# EAGLE board Right (EAGLE 8.2.0)
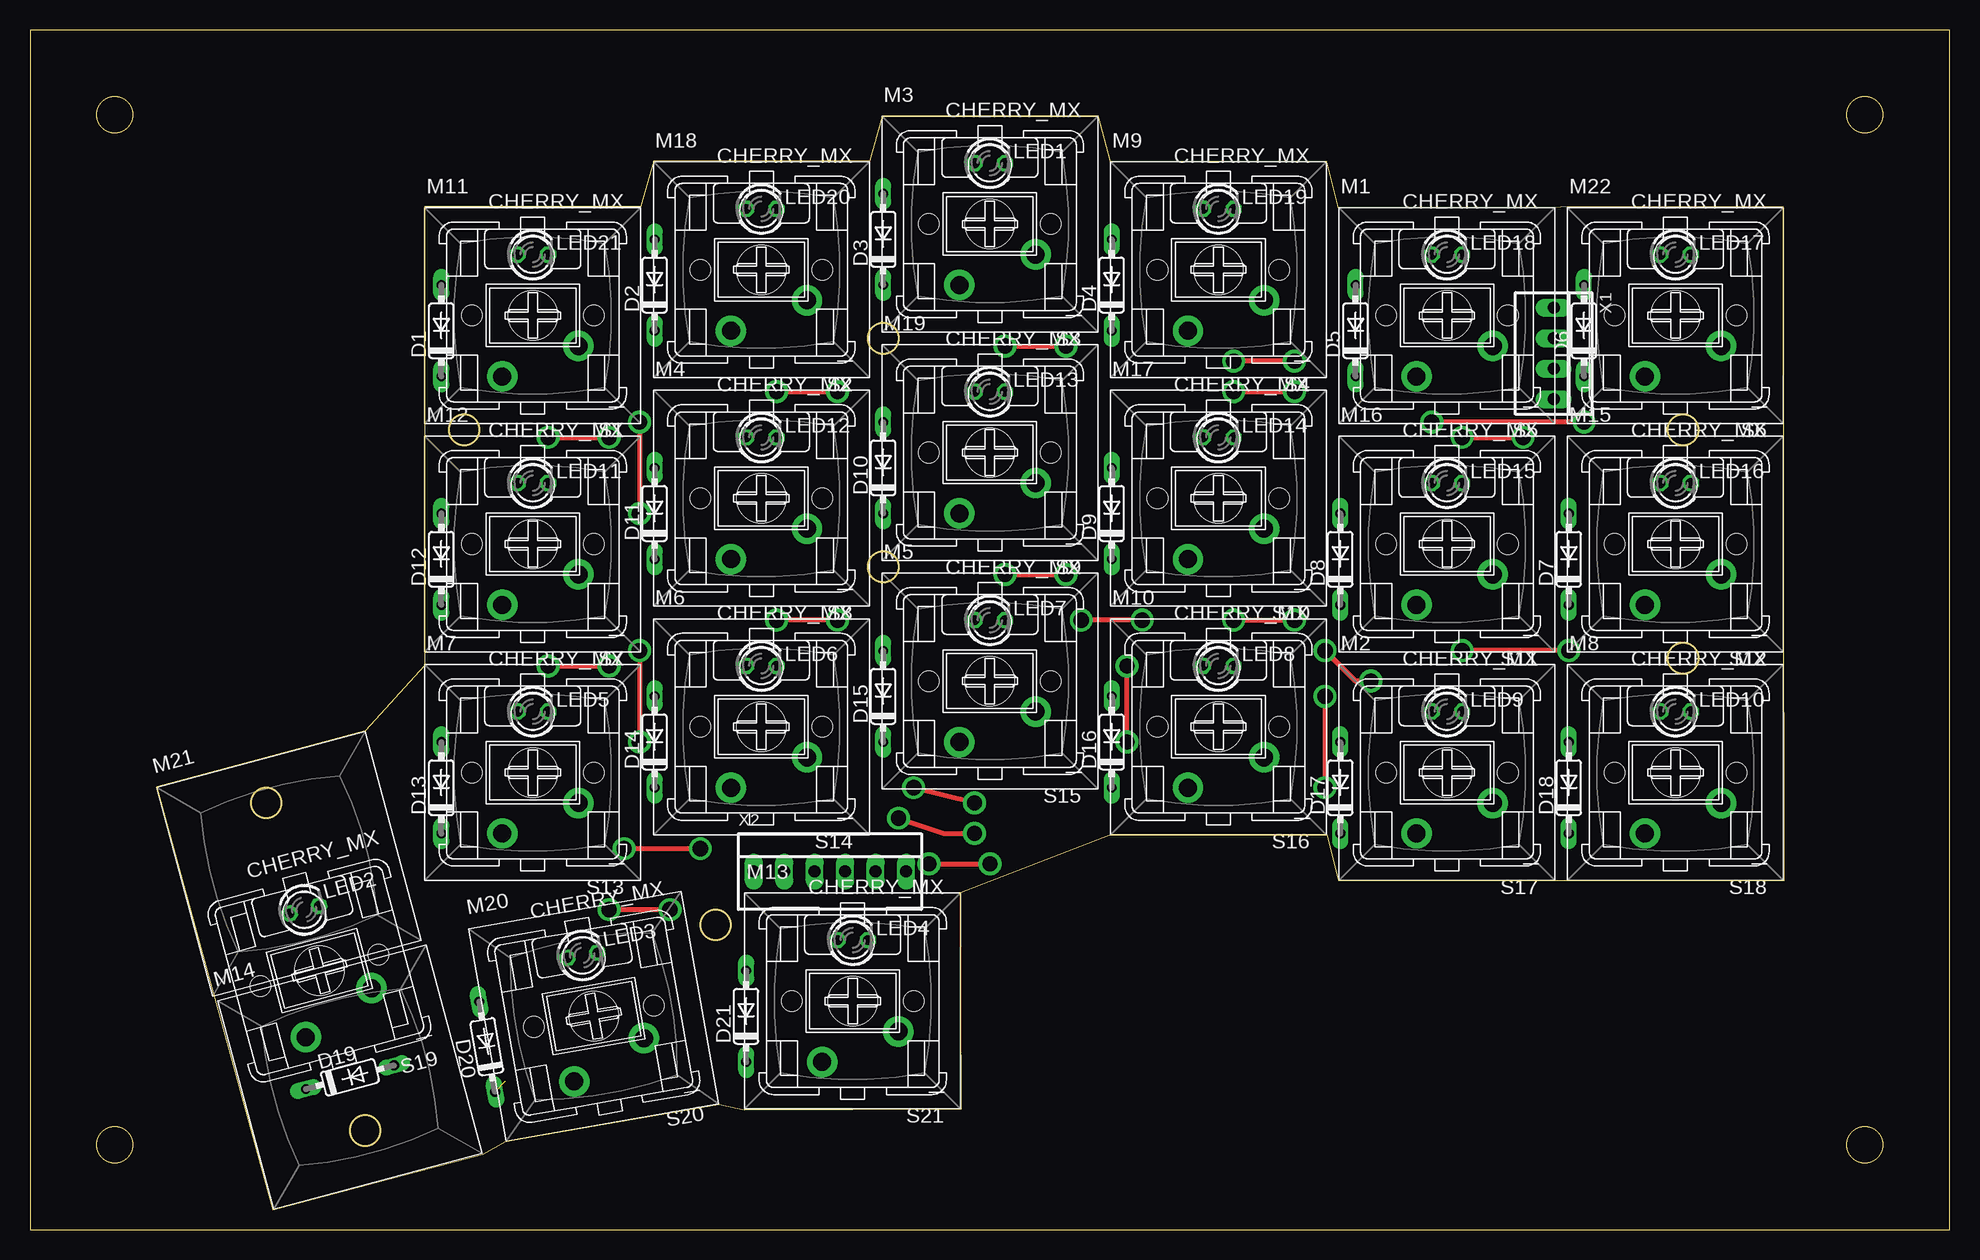
[diagram p0: board, top side]
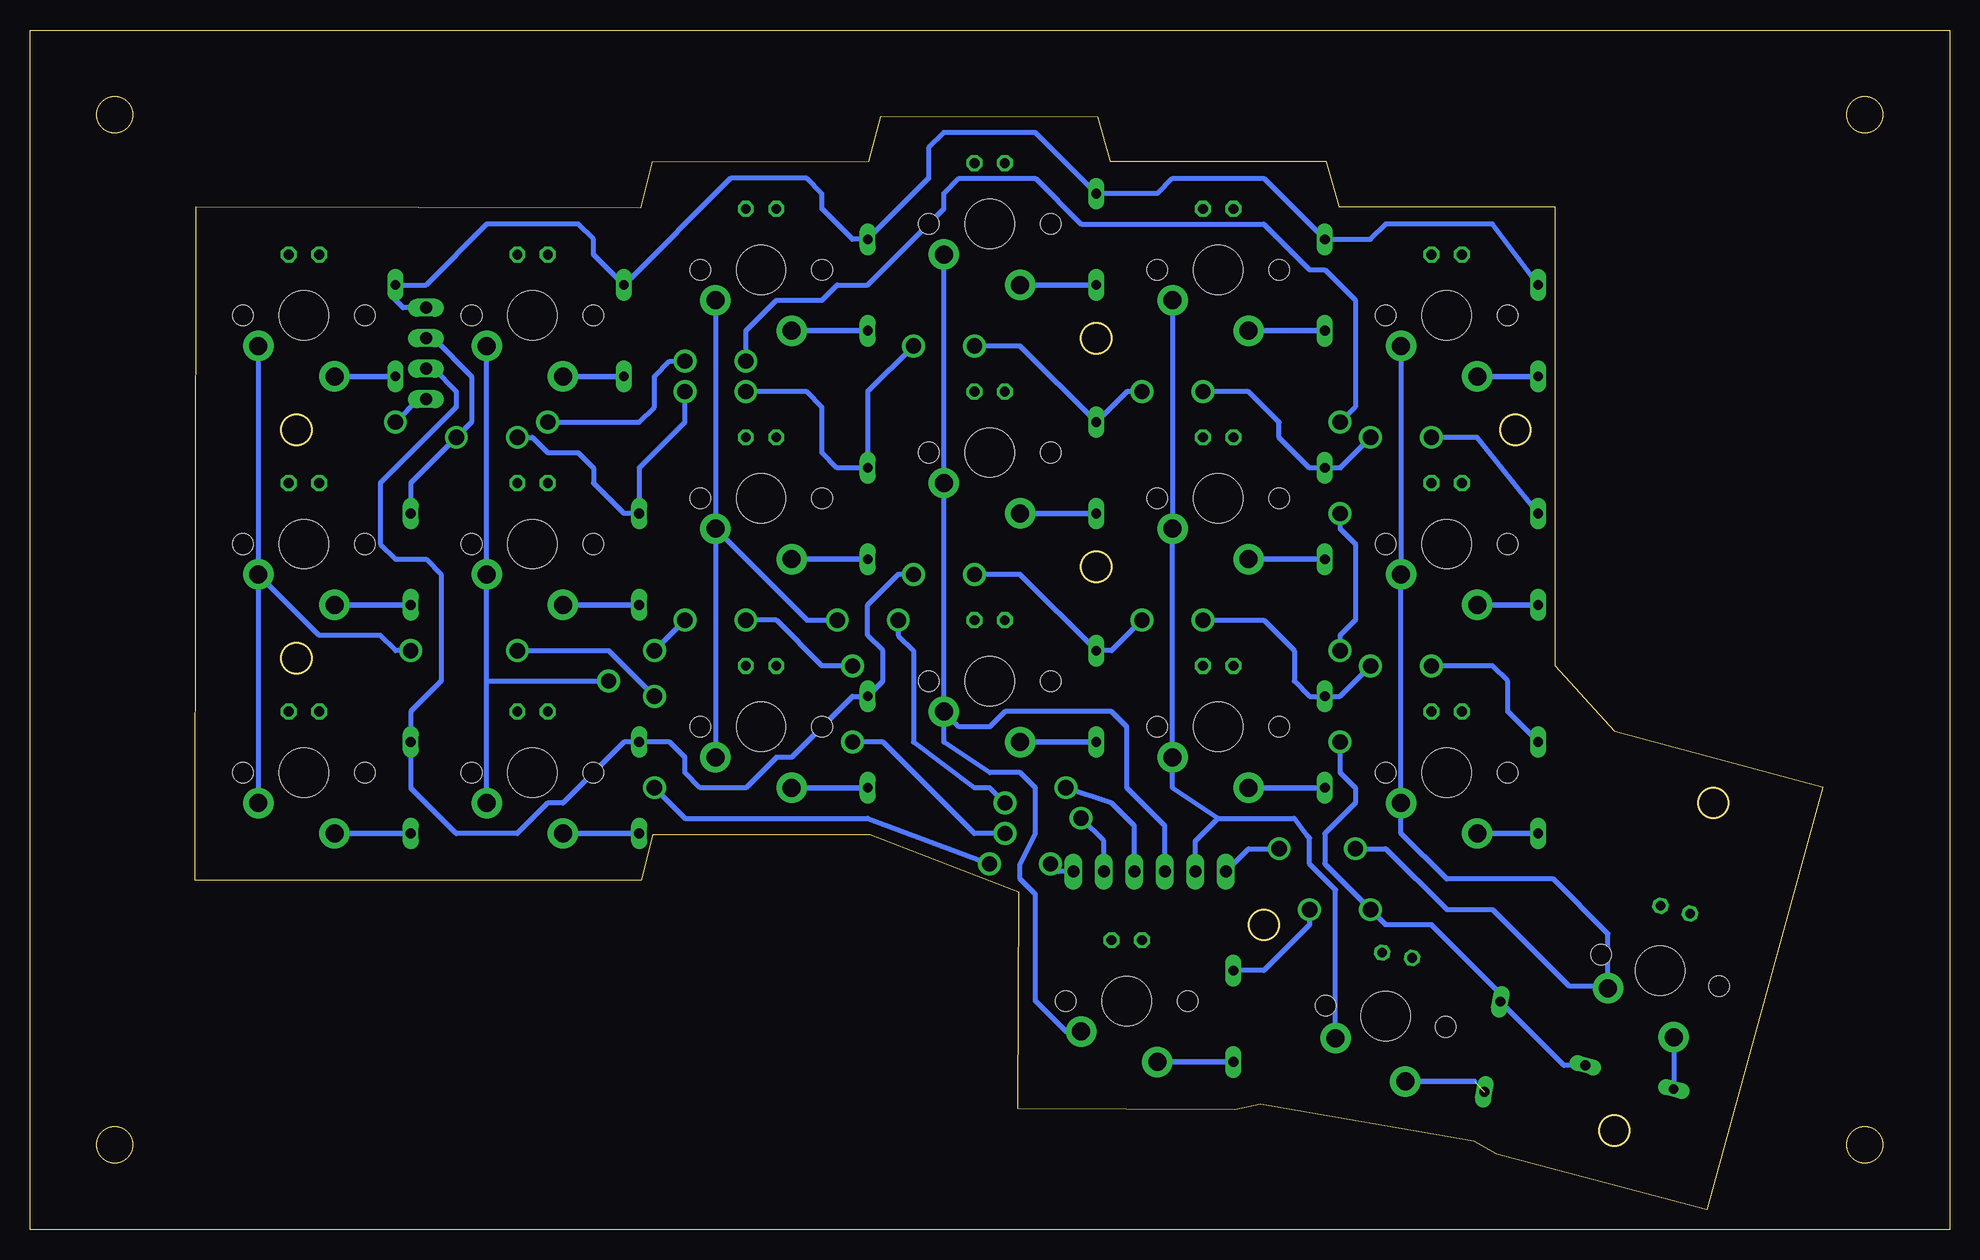
[diagram p1: board, bottom side, seen from below]

Size 160 x 100 mm. Coordinates in mm from the lower left corner, seen from the top.
Outline: 0,0 160,0 160,100 0,100 0,0
Outline: 20.25,1.66 37.71,6.28 39.63,7.34 57.43,10.42 59.58,9.99 77.64,10.05 77.58,28.11 90,32.91 108.12,32.91 109.05,29.1 146.22,29.1 146.16,85.26 109.05,85.2 108.12,89.01 90.06,89.07 89.07,92.82 71.01,92.76 69.96,89.07 51.96,89.07 50.91,85.26 32.91,85.26 32.91,47.01 27.94,41.56 10.55,36.91 20.25,1.66
Outline: circle at 7.07,92.93 radius 1.5
Outline: circle at 7.07,7.07 radius 1.5
Outline: circle at 152.93,7.07 radius 1.5
Outline: circle at 152.93,92.93 radius 1.5
Outline: circle at 71.12,55.24 radius 1.27
Outline: circle at 71.12,74.3 radius 1.27
Outline: circle at 137.79,66.67 radius 1.27
Outline: circle at 137.79,47.62 radius 1.27
Outline: circle at 36.2,66.67 radius 1.27
Outline: circle at 19.68,35.56 radius 1.27
Outline: circle at 27.94,8.26 radius 1.27
Outline: circle at 57.15,25.4 radius 1.27
Copper layers (1*16): Top 0.035mm / dielectric 1.5mm / Bottom 0.035mm
Design rules "default": minimum track width 6mil, minimum drill 0.35mm, track to track 6mil, track to pad 6mil, pad to pad 6mil, via to via 6mil, smd to smd 6mil, copper to edge 40mil, drill to drill 6mil, minimum pad ring 10mil, minimum via ring 8mil, stop-mask expansion 4mil, vias tented up to drill 0mil, thermal gap 10mil

## Footprints (pad centres in the part's own frame; a part is rotated, then mirrored left to right if it is on the bottom)
DO35-7 = drill 0.813 long: A 3.81,0; C -3.81,0
LED3MM = drill 0.813 octagon: A -1.27,0; K 1.27,0
CHERRY_MX = drill 1.5 pad 2.54: S1 -3.81,2.54; S2 2.54,5.08 | hole 1.7: -5.08,0; 5.08,0 | hole 4.1: 0,0
22-23-2041 = drill 1 long: 1 -3.81,0; 2 -1.27,0; 3 1.27,0; 4 3.81,0
22-23-2061 = drill 1 long: 1 -6.35,0; 2 -3.81,0; 3 -1.27,0; 4 1.27,0; 5 3.81,0; 6 6.35,0

## Placement (x,y rotation side)
D1  1N4148DO35-7  [DO35-7]  34.29,74.93 90 top
D2  1N4148DO35-7  [DO35-7]  52.07,78.74 90 top
D3  1N4148DO35-7  [DO35-7]  71.12,82.55 90 top
D4  1N4148DO35-7  [DO35-7]  90.17,78.74 90 top
D5  1N4148DO35-7  [DO35-7]  110.49,74.93 90 top
D6  1N4148DO35-7  [DO35-7]  129.54,74.93 90 top
D7  1N4148DO35-7  [DO35-7]  128.27,55.88 90 top
D8  1N4148DO35-7  [DO35-7]  109.22,55.88 90 top
D9  1N4148DO35-7  [DO35-7]  90.17,59.69 90 top
D10  1N4148DO35-7  [DO35-7]  71.12,63.5 90 top
D11  1N4148DO35-7  [DO35-7]  52.07,59.69 90 top
D12  1N4148DO35-7  [DO35-7]  34.29,55.88 90 top
D13  1N4148DO35-7  [DO35-7]  34.29,36.83 90 top
D14  1N4148DO35-7  [DO35-7]  52.07,40.64 90 top
D15  1N4148DO35-7  [DO35-7]  71.12,44.45 90 top
D16  1N4148DO35-7  [DO35-7]  90.17,40.64 90 top
D17  1N4148DO35-7  [DO35-7]  109.22,36.83 90 top
D18  1N4148DO35-7  [DO35-7]  128.27,36.83 90 top
D19  1N4148DO35-7  [DO35-7]  26.67,12.7 15 top
D20  1N4148DO35-7  [DO35-7]  38.1,15.24 100 top
D21  1N4148DO35-7  [DO35-7]  59.69,17.78 90 top
LED1  [LED3MM]  80.01,88.9 0 top
LED2  [LED3MM]  22.86,26.67 15 top
LED3  [LED3MM]  46.04,22.86 10 top
LED4  [LED3MM]  68.58,24.13 0 top
LED5  [LED3MM]  41.91,43.18 0 top
LED6  [LED3MM]  60.96,46.99 0 top
LED7  [LED3MM]  80.01,50.8 0 top
LED8  [LED3MM]  99.06,46.99 0 top
LED9  [LED3MM]  118.11,43.18 0 top
LED10  [LED3MM]  137.16,43.18 0 top
LED11  [LED3MM]  41.91,62.23 0 top
LED12  [LED3MM]  60.96,66.04 0 top
LED13  [LED3MM]  80.01,69.85 0 top
LED14  [LED3MM]  99.06,66.04 0 top
LED15  [LED3MM]  118.11,62.23 0 top
LED16  [LED3MM]  137.16,62.23 0 top
LED17  [LED3MM]  137.16,81.28 0 top
LED18  [LED3MM]  118.11,81.28 0 top
LED19  [LED3MM]  99.06,85.09 0 top
LED20  [LED3MM]  60.96,85.09 0 top
LED21  [LED3MM]  41.91,81.28 0 top
M1  DSA_KEYCAP  [DSA_KEYCAP]  118.11,76.2 0 top
M2  DSA_KEYCAP  [DSA_KEYCAP]  118.11,38.1 0 top
M3  DSA_KEYCAP  [DSA_KEYCAP]  80.01,83.82 0 top
M4  DSA_KEYCAP  [DSA_KEYCAP]  60.96,60.96 0 top
M5  DSA_KEYCAP  [DSA_KEYCAP]  80.01,45.72 0 top
M6  DSA_KEYCAP  [DSA_KEYCAP]  60.96,41.91 0 top
M7  DSA_KEYCAP  [DSA_KEYCAP]  41.91,38.1 0 top
M8  DSA_KEYCAP  [DSA_KEYCAP]  137.16,38.1 0 top
M9  DSA_KEYCAP  [DSA_KEYCAP]  99.06,80.01 0 top
M10  DSA_KEYCAP  [DSA_KEYCAP]  99.06,41.91 0 top
M11  DSA_KEYCAP  [DSA_KEYCAP]  41.91,76.2 0 top
M12  DSA_KEYCAP  [DSA_KEYCAP]  41.91,57.15 0 top
M13  DSA_KEYCAP  [DSA_KEYCAP]  68.58,19.05 0 top
M14  DSA_KEYCAP  [DSA_KEYCAP]  26.67,12.7 15 top
M15  DSA_KEYCAP  [DSA_KEYCAP]  137.16,57.15 0 top
M16  DSA_KEYCAP  [DSA_KEYCAP]  118.11,57.15 0 top
M17  DSA_KEYCAP  [DSA_KEYCAP]  99.06,60.96 0 top
M18  DSA_KEYCAP  [DSA_KEYCAP]  60.96,80.01 0 top
M19  DSA_KEYCAP  [DSA_KEYCAP]  80.01,64.77 0 top
M20  DSA_KEYCAP  [DSA_KEYCAP]  46.99,17.78 10 top
M21  DSA_KEYCAP  [DSA_KEYCAP]  21.59,30.48 15 top
M22  DSA_KEYCAP  [DSA_KEYCAP]  137.16,76.2 0 top
S1  CHERRY_MX  [CHERRY_MX]  41.91,76.2 180 top
S2  CHERRY_MX  [CHERRY_MX]  60.96,80.01 180 top
S3  CHERRY_MX  [CHERRY_MX]  80.01,83.82 180 top
S4  CHERRY_MX  [CHERRY_MX]  99.06,80.01 180 top
S5  CHERRY_MX  [CHERRY_MX]  118.11,76.2 180 top
S6  CHERRY_MX  [CHERRY_MX]  137.16,76.2 180 top
S7  CHERRY_MX  [CHERRY_MX]  41.91,57.15 180 top
S8  CHERRY_MX  [CHERRY_MX]  60.96,60.96 180 top
S9  CHERRY_MX  [CHERRY_MX]  80.01,64.77 180 top
S10  CHERRY_MX  [CHERRY_MX]  99.06,60.96 180 top
S11  CHERRY_MX  [CHERRY_MX]  118.11,57.15 180 top
S12  CHERRY_MX  [CHERRY_MX]  137.16,57.15 180 top
S13  CHERRY_MX  [CHERRY_MX]  41.91,38.1 180 top
S14  CHERRY_MX  [CHERRY_MX]  60.96,41.91 180 top
S15  CHERRY_MX  [CHERRY_MX]  80.01,45.72 180 top
S16  CHERRY_MX  [CHERRY_MX]  99.06,41.91 180 top
S17  CHERRY_MX  [CHERRY_MX]  118.11,38.1 180 top
S18  CHERRY_MX  [CHERRY_MX]  137.16,38.1 180 top
S19  CHERRY_MX  [CHERRY_MX]  24.13,21.59 195 top
S20  CHERRY_MX  [CHERRY_MX]  46.99,17.78 190 top
S21  CHERRY_MX  [CHERRY_MX]  68.58,19.05 180 top
X1  22-23-2041  [22-23-2041]  127,73.03 270 top
X2  [22-23-2061]  66.67,29.84 0 top

## Library data of the parts
D1-D21 = diode
LED1-LED21 = led
M1-M22 = cherry
S1-S21 = cherry; FARNELL: 2292961; MOUSER: 540-MX1A-11NW
X1 = con-molex; MF: MOLEX; MPN: 22-23-2041; OC_FARNELL: 1462920; OC_NEWARK: 38C0355
X2 = con-molex; MF: MOLEX; MPN: 22-23-2061; OC_FARNELL: 1462922; OC_NEWARK: 27C1933

## Nets
N$1: D1.C S1.S2
N$2: D2.C S2.S2
N$3: D3.C S3.S2
N$4: D4.C S4.S2
N$5: D5.C S5.S2
N$6: D6.C S6.S2
N$7: D7.C S12.S2
N$8: D8.C S11.S2
N$9: D9.C S10.S2
N$10: D10.C S9.S2
N$11: D11.C S8.S2
N$12: D12.C S7.S2
N$13: D13.C S13.S2
N$14: D14.C S14.S2
N$15: D15.C S15.S2
N$16: D16.C S16.S2
N$17: D17.C S17.S2
N$18: D18.C S18.S2
N$19: D19.C S19.S2
N$20: D20.C S20.S2
N$21: D21.C S21.S2
N$22: S3.S1 S9.S1 S15.S1 S21.S1 X2.3
N$23: S2.S1 S8.S1 S14.S1 S20.S1 X2.2
N$24: S1.S1 S7.S1 S13.S1 S19.S1 X2.1
N$25: S4.S1 S10.S1 S16.S1 X2.4
N$26: S5.S1 S11.S1 S17.S1 X2.5
N$27: S6.S1 S12.S1 S18.S1 X2.6
N$28: D19.A D20.A D21.A X1.4
N$29: D13.A D14.A D15.A D16.A D17.A D18.A X1.3
N$30: D7.A D8.A D9.A D10.A D11.A D12.A X1.2
N$31: D1.A D2.A D3.A D4.A D5.A D6.A X1.1

## Tracks (layer width: path | path; a pad name or v marks a point on that pad's centre or on a via)
N$1
  Bottom 0.457: S1.S2 D1.C
N$2
  Bottom 0.457: D2.C S2.S2
N$3
  Bottom 0.457: D3.C S3.S2
N$4
  Bottom 0.457: D4.C S4.S2
N$5
  Bottom 0.457: D5.C S5.S2
N$6
  Bottom 0.457: S6.S2 D6.C
N$7
  Bottom 0.457: S12.S2 D7.C
N$8
  Bottom 0.457: S11.S2 D8.C
N$9
  Bottom 0.457: S10.S2 D9.C
N$10
  Bottom 0.457: S9.S2 D10.C
N$11
  Bottom 0.457: D11.C S8.S2
N$12
  Bottom 0.457: D12.C S7.S2
N$13
  Bottom 0.457: S13.S2 D13.C
N$14
  Bottom 0.457: S14.S2 D14.C
N$15
  Bottom 0.457: S15.S2 D15.C
N$16
  Bottom 0.457: D16.C S16.S2
N$17
  Bottom 0.457: S17.S2 D17.C
N$18
  Bottom 0.457: S18.S2 D18.C
N$19
  Bottom 0.406: S19.S2 D19.C
N$20  (1 unrouted)
  Bottom 0.457: S20.S2 39.61,12.34
N$21
  Bottom 0.457: S21.S2 D21.C
N$22
  Bottom 0.406: S15.S1 S9.S1 S3.S1 | S15.S1 83.82,40.64 80.01,38.1 77.47,38.1 76.2,36.83 76.2,33.02 77.47,30.48 77.47,29.21 76.2,27.94 76.2,19.05 73.66,16.51 S21.S1 | X2.3 65.41,33.66 68.58,36.83 68.58,41.91 69.85,43.18 78.74,43.18 80.01,41.91 82.55,41.91 S15.S1
N$23
  Bottom 0.406: S2.S1 S8.S1 S14.S1 64.77,36.83 60.96,34.29 | 60.96,34.29 54.61,34.29 53.56,32.86 53.34,32.63 53.34,30.48 51.18,28.32 S20.S1 | X2.2 62.87,32.38 60.96,34.29
N$24  (via drill 1.27)
  Top 0.406: v55.88,31.75 v49.53,31.75
  Bottom 0.406: S1.S1 S7.S1 S13.S1 45.72,33.02 41.91,29.21 33.02,29.21 28.47,24.66 S19.S1 28.66,20.32 31.75,20.32 38.1,26.67 41.91,26.67 46.99,31.75 v49.53,31.75 | X2.1 58.42,31.75 v55.88,31.75
N$25  (via drill 1.27)
  Top 0.406: v92.71,50.8 v87.63,50.8 | v78.74,35.56 v73.66,36.83
  Bottom 0.406: S4.S1 S10.S1 | S10.S1 S16.S1 | v87.63,50.8 87.63,49.53 86.36,48.26 86.36,40.64 81.28,36.83 80.01,36.83 v78.74,35.56 | v73.66,36.83 69.85,35.56 67.94,33.66 X2.4 | S10.S1 95.25,50.8 v92.71,50.8
N$26  (via drill 1.27)
  Top 0.406: v72.39,34.29 76.2,33.02 v78.74,33.02 | v111.76,45.72 110.49,45.72 v107.95,48.26 | v91.44,40.64 v91.44,46.99 | v100.33,50.8 v105.41,50.8
  Bottom 0.406: S17.S1 121.92,45.72 | 121.92,45.72 S11.S1 S5.S1 | X2.5 70.48,32.38 v72.39,34.29 | 121.92,45.72 v111.76,45.72 | v78.74,33.02 81.28,33.02 88.9,40.64 v91.44,40.64 | v91.44,46.99 93.98,46.99 97.79,50.8 v100.33,50.8 | v105.41,50.8 v107.95,48.26
N$27  (via drill 1.27)
  Top 0.406: v74.93,30.48 v80.01,30.48 | v128.27,48.26 v119.38,48.26 | v107.95,44.45 v107.95,36.83
  Bottom 0.406: S12.S1 S18.S1 | S6.S1 S12.S1 | X2.6 74.3,29.84 v74.93,30.48 | v119.38,48.26 111.76,48.26 v107.95,44.45 | v107.95,36.83 105.41,34.29 90.17,34.29 v80.01,30.48 | S12.S1 135.89,49.53 130.81,49.53 129.54,48.26 v128.27,48.26
N$28  (via drill 1.27)
  Top 0.406: v48.26,26.67 v53.34,26.67 | v129.54,67.31 v116.84,67.31 | v105.41,72.39 v100.33,72.39 | v50.8,67.31 v50.8,59.69 | v50.8,48.26 v50.8,40.64
  Bottom 0.406: D19.A 32.13,13.69 D20.A 37.44,19.66 43.18,25.4 46.99,25.4 v48.26,26.67 52.07,30.48 52.07,33.02 49.53,35.56 49.53,36.83 50.8,38.1 v50.8,40.64 | v53.34,26.67 53.34,25.4 57.15,21.59 D21.A | X1.4 127.64,69.22 v129.54,67.31 | v116.84,67.31 109.22,67.31 107.95,68.58 107.95,71.12 106.68,72.39 v105.41,72.39 | v100.33,72.39 100.33,74.93 97.79,77.47 93.98,77.47 92.71,78.74 90.17,78.74 83.82,85.09 83.82,86.36 82.55,87.63 76.2,87.63 72.39,83.82 57.15,83.82 53.34,80.01 52.07,80.01 49.53,77.47 49.53,68.58 v50.8,67.31 | v50.8,59.69 50.8,58.42 49.53,57.15 49.53,50.8 50.8,49.53 v50.8,48.26
N$29  (via drill 1.27)
  Top 0.406: v43.18,46.99 v48.26,46.99 | v67.31,50.8 v62.23,50.8 | v81.28,54.61 v86.36,54.61
  Bottom 0.406: D13.A 36.83,43.18 36.83,45.72 38.1,46.99 v43.18,46.99 | v48.26,46.99 50.8,44.45 D14.A 53.34,44.45 54.61,45.72 54.61,48.26 57.15,50.8 v62.23,50.8 | v67.31,50.8 69.85,48.26 D15.A 77.47,54.61 v81.28,54.61 | v86.36,54.61 87.63,54.61 90.17,52.07 90.17,49.53 88.9,48.26 88.9,45.72 D16.A 91.44,44.45 96.52,39.37 97.79,39.37 100.33,36.83 104.14,36.83 105.41,38.1 105.41,39.37 106.68,40.64 D17.A 110.49,40.64 115.57,35.56 116.84,35.56 119.38,33.02 124.46,33.02 128.27,36.83 D18.A 128.27,43.18 125.73,45.72 125.73,54.61 127,55.88 129.54,55.88 130.81,57.15 130.81,62.23 124.46,68.58 124.46,69.85 126.36,71.75 X1.3
N$30  (via drill 1.27)
  Top 0.406: v43.18,66.04 v48.26,66.04 | v62.23,69.85 v67.31,69.85 | v81.28,73.66 v86.36,73.66 | v100.33,69.85 v105.41,69.85 | v119.38,66.04 v124.46,66.04
  Bottom 0.406: D12.A 39.37,66.04 v43.18,66.04 | v48.26,66.04 50.8,63.5 D11.A 53.34,63.5 55.88,66.04 55.88,67.31 58.42,69.85 v62.23,69.85 | v67.31,69.85 68.58,69.85 D10.A 77.47,73.66 v81.28,73.66 | v86.36,73.66 90.17,69.85 D9.A 92.71,63.5 93.98,64.77 93.98,68.58 95.25,69.85 v100.33,69.85 | v105.41,69.85 105.41,67.31 109.22,63.5 D8.A 110.49,59.69 113.03,62.23 113.03,63.5 114.3,64.77 116.84,64.77 118.11,66.04 v119.38,66.04 | D7.A 128.27,62.23 v124.46,66.04 123.19,67.31 123.19,71.12 126.36,74.3 X1.2
N$31
  Bottom 0.406: D1.A 38.1,83.82 46.99,83.82 48.26,82.55 D2.A 57.15,87.63 64.77,87.63 66.04,86.36 D3.A 76.2,91.44 83.82,91.44 85.09,90.17 85.09,87.63 D4.A 91.44,82.55 93.98,85.09 93.98,86.36 95.25,87.63 101.6,87.63 D5.A 113.03,81.28 113.03,82.55 114.3,83.82 121.92,83.82 127,78.74 D6.A 129.54,77.47 128.91,76.83 X1.1